# EAGLE board source_eagle (EAGLE 9.6.2)
REV: A
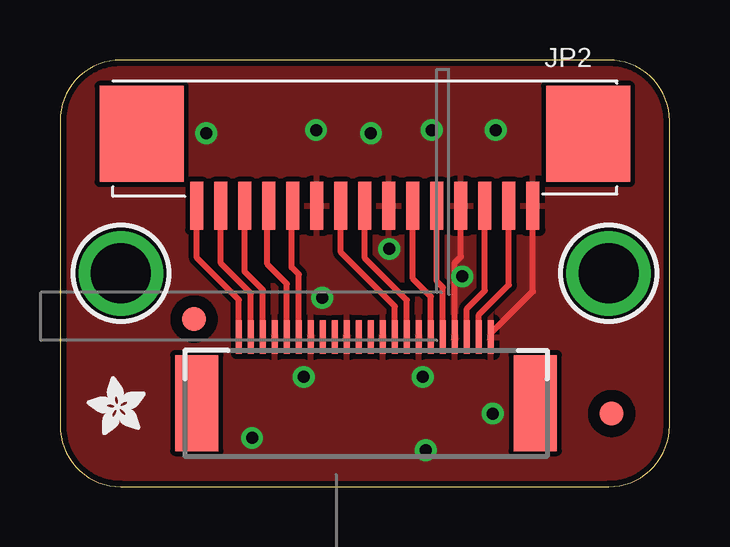
[diagram p0: board, top side]
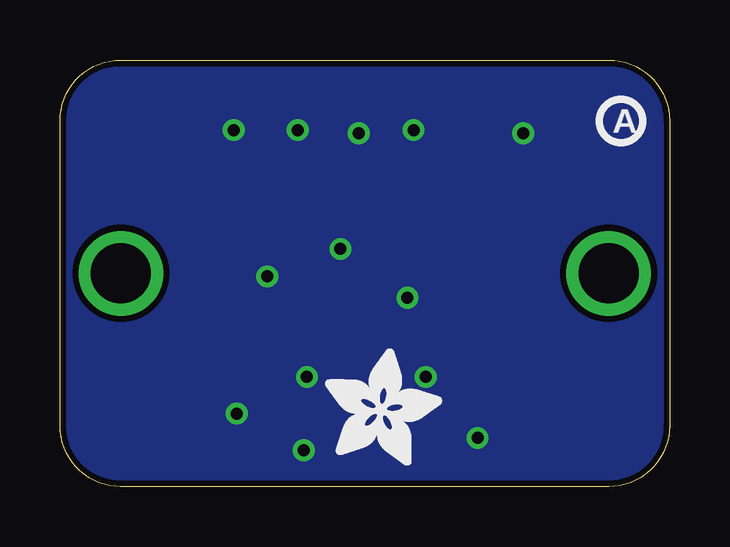
[diagram p1: board, bottom side, seen from below]

Size 25.4 x 17.78 mm. Coordinates in mm from the lower left corner, seen from the top.
Outline: 0,15.24 0,2.54 arc90 2.54,0 22.86,0 arc90 25.4,2.54 25.4,15.24 arc90 22.86,17.78 2.54,17.78 arc90 0,15.24
Copper layers (1*16): Top 0.035mm / dielectric 1.5mm / Bottom 0.035mm
Design rules "adafruit 8-8": minimum track width 6mil, minimum drill 15.5mil, track to track 8mil, track to pad 8mil, pad to pad 8mil, via to via 8mil, smd to smd 8mil, copper to edge 10mil, drill to drill 8mil, minimum pad ring 10mil, minimum via ring 8mil, stop-mask expansion 2mil, vias tented up to drill 20mil, thermal gap 10mil

## Footprints (pad centres in the part's own frame; a part is rotated, then mirrored left to right if it is on the bottom)
FPC_22PIN = smd 0.25 x 1.4: 1 -5.25,-1.154; 2 -4.75,-1.154; 3 -4.25,-1.154; 4 -3.75,-1.154; 5 -3.25,-1.154; 6 -2.75,-1.154; 7 -2.25,-1.154; 8 -1.75,-1.154; 9 -1.25,-1.154; 10 -0.75,-1.154; 11 -0.25,-1.154; 12 0.25,-1.154; 13 0.75,-1.154; 14 1.25,-1.154; 15 1.75,-1.154; 16 2.25,-1.154; 17 2.75,-1.154; 18 3.25,-1.154; 19 3.75,-1.154; 20 4.25,-1.154; 21 4.75,-1.154; 22 5.25,-1.154 | smd 1.8 x 4: SUPPORT1 7,1.598; SUPPORT2 -7.1,1.598
FIDUCIAL_1MM = smd 1 x 1: 1 0,0
FPC_15PIN_1.0MM = smd 0.55 x 2: 1 -7,1; 2 -6,1; 3 -5,1; 4 -4,1; 5 -3,1; 6 -2,1; 7 -1,1; 8 0,1; 9 1,1; 10 2,1; 11 3,1; 12 4,1; 13 5,1; 14 6,1; 15 7,1 | smd 3.5 x 4: M1 -9.3,-2; M2 9.3,-2
MOUNTINGHOLE_2.5_PLATED = drill 2.5 pad 3.2: P$1 0,0

## Placement (x,y rotation side)
CN1  22p BOTTOM 0.5mm FPC  [FPC_22PIN]  12.7,5.08 180 top
FID1  FIDUCIAL_1MM  [FIDUCIAL_1MM]  22.99,3.05 0 top
FID2  FIDUCIAL_1MM  [FIDUCIAL_1MM]  5.59,6.99 0 top
JP2  15p BOTTOM 1mm FPC  [FPC_15PIN_1.0MM]  12.7,12.7 180 top
PLABEL0  [PLABEL0]  12.7,9.02 0 top
PLABEL1  [PLABEL1]  18.92,6.35 0 top
PLABEL2  [PLABEL2]  20.45,11.05 0 top
PLABEL3  [PLABEL3]  12.45,11.3 0 bottom
U$2  MOUNTINGHOLE2.5  [MOUNTINGHOLE_2.5_PLATED]  2.54,8.89 0 top
U$3  MOUNTINGHOLE2.5  [MOUNTINGHOLE_2.5_PLATED]  22.86,8.89 0 top
U$4  [ADAFRUIT_2.5MM]  3.56,2.16 90 top
U$5  [ADAFRUIT_5MM]  14.35,0.89 0 bottom
U$6  [PCBFEAT-REV-040]  2.03,15.24 0 bottom

## Library data of the parts
CN1 JP2 = adafruit_electromech
FID1 FID2 = microbuilder; BOM: EXCLUDE
PLABEL0 PLABEL1-PLABEL3 = pinguin
U$2 U$3 = adafruit_electromech; BOM: EXCLUDE
U$4 U$5 = microbuilder
U$6 = microbuilder; REV: A

## Nets
CAM_3V3: CN1.22 JP2.15
CAM_CK+: CN1.9 JP2.9
CAM_CK-: CN1.8 JP2.8
CAM_D0+: CN1.3 JP2.3
CAM_D0-: CN1.2 JP2.2
CAM_D1+: CN1.6 JP2.6
CAM_D1-: CN1.5 JP2.5
CAM_IO0: CN1.17 JP2.11
CAM_IO1: CN1.18 JP2.12
CAM_SCL: CN1.20 JP2.13
CAM_SDA: CN1.21 JP2.14
GND: CN1.1 CN1.4 CN1.7 CN1.10 CN1.13 CN1.16 CN1.19 JP2.1 JP2.4 JP2.7 JP2.10

## Tracks (layer width: path | path; a pad name or v marks a point on that pad's centre or on a via)
CAM_3V3
  Top 0.254: CN1.22 7.45,7.79 5.7,9.54 JP2.15
CAM_CK+
  Top 0.254: CN1.9 13.95,7.51 11.7,9.76 JP2.9
CAM_CK-
  Top 0.254: CN1.8 14.45,7.78 12.7,9.53 JP2.8
CAM_D0+
  Top 0.254: CN1.3 16.95,7.42 17.7,8.18 JP2.3
CAM_D0-
  Top 0.254: CN1.2 17.45,7.16 18.7,8.41 JP2.2
CAM_D1+
  Top 0.254: CN1.6 15.45,7.92 14.7,8.67 JP2.6
CAM_D1-
  Top 0.254: CN1.5 15.95,8.31 15.7,8.56 JP2.5
CAM_IO0
  Top 0.254: CN1.17 9.95,8.85 9.65,9.14 9.65,11.65 JP2.11
CAM_IO1
  Top 0.254: CN1.18 9.45,8.46 8.64,9.27 8.64,11.64 JP2.12
CAM_SCL
  Top 0.254: CN1.20 8.45,8.2 7.69,8.96 JP2.13
CAM_SDA
  Top 0.254: CN1.21 7.95,8.05 6.7,9.3 JP2.14
GND  (via drill 0.5)
  Top 0.254: CN1.4 16.45,9.34 16.7,9.59 JP2.4 | CN1.1 17.95,6.39 19.7,8.14 JP2.1
  other vias: 10.16,4.57 8,2.03 15.11,4.57 15.24,1.52 18.03,3.05 10.92,7.87 13.72,9.91 16.76,8.76 15.49,14.86 18.16,14.86 12.95,14.73 10.67,14.86 6.1,14.73
  pour Top: 0,17.78 25.4,17.78 25.4,0 0,0
  pour Bottom: 0,17.78 25.4,17.78 25.4,0 0,0

## Text on the board
Pinguin_tBackup: 1 | Pi CSI/DSI Adapter | 1
Pinguin_bBackup: Camera & Display / 15 Pin 1mm Pitch / 22 Pin 0.5mm Pitch / Cable Adapter / For Raspbery Pi